# Altium PCB RF_AMPL_001.PcbDoc (part 2 of 2)
Units mm, origin at the board's own origin, x right, y up, seen from the top; angles counter-clockwise.
Board outline 164 x 92 mm, 4 copper layers (TOP, GND, SIG, BOT), stack 1.625 mm thick; 120 components, 60 nets, 294 pads, 1389 vias.
Unrouted connection lines stored in the file: 51.
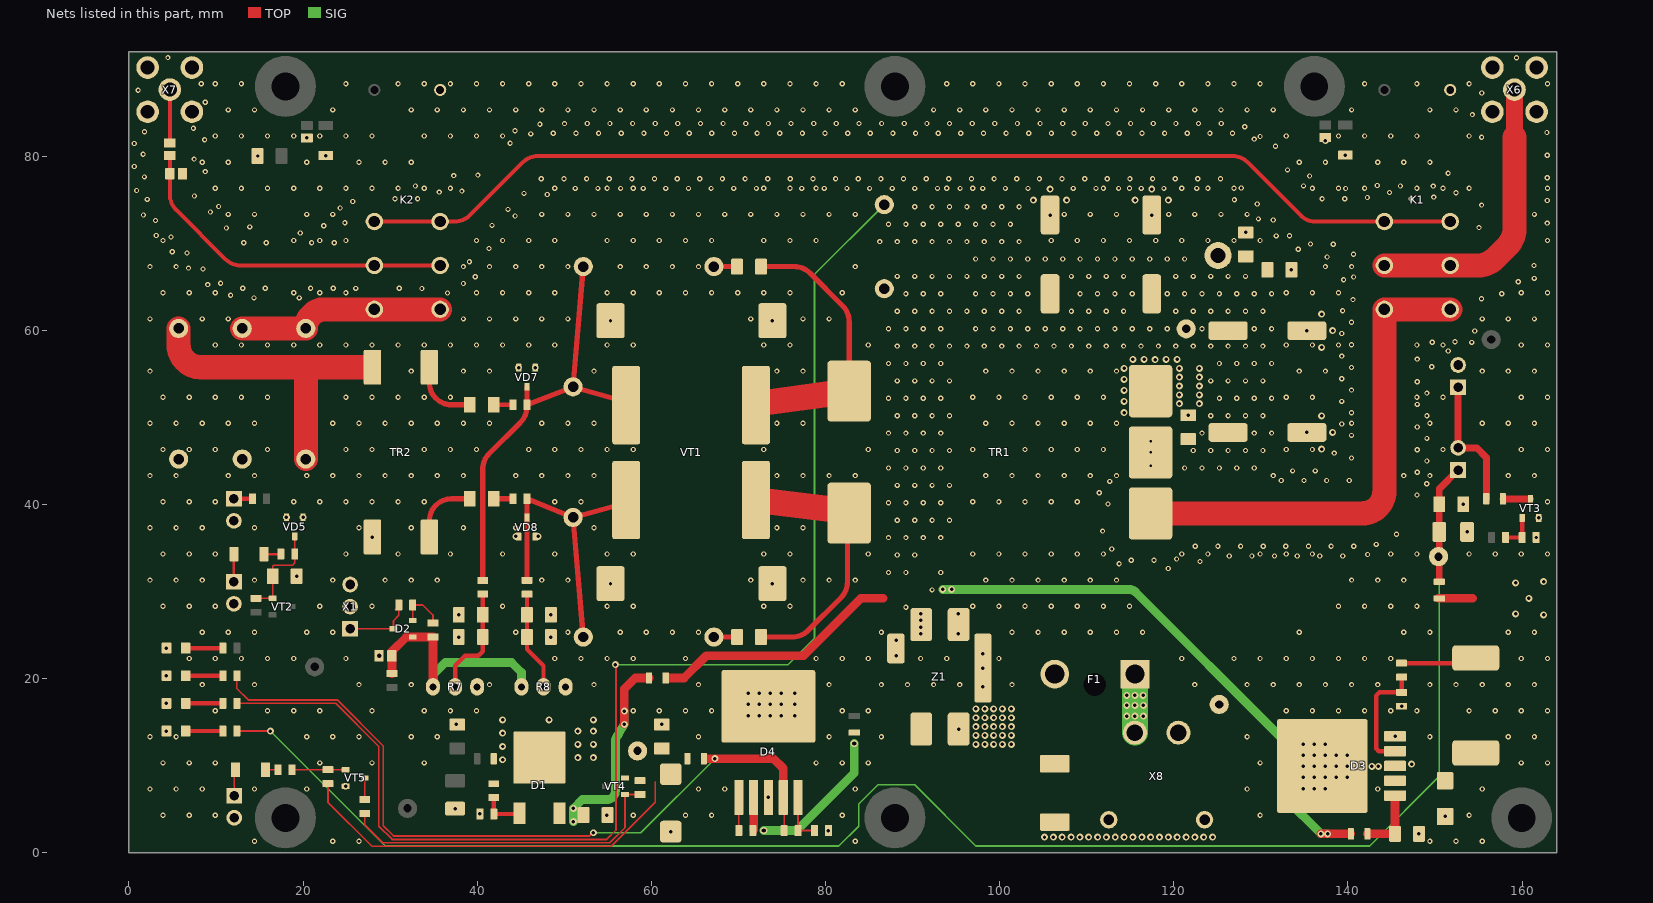
[diagram p4: the nets of this part, all layers, seen from the top]

## Via types
v1: diameter 0.6, hole 0.3, TOP to BOT, tented both sides, 1161 vias
v2: diameter 0.8, hole 0.4, TOP to BOT, tented both sides, 222 vias
v3: diameter 0.85, hole 0.5, TOP to BOT, tented both sides, 6 vias

## Nets (pads, with @x,y where several pads share a name; then routed paths per layer and width w, separated by ;. In a path a pad name is that pad's centre, name@x,y a point inside that pad or via, vN(x,y) a via of type N, cw(c..) or ccw(c..) an arc to the next point about the centre after c; other vN are vias at no path point) (continued)
+24V_IN: C1.2 C2.1 C11.1 C12.1 C13.1 C14.1 C16.1 L1.1 R27.1 TP5.1 TP6.1 TR1.4 | length 152.1
  TOP w0.2: R27.1@12.395,17.145 23.749,17.145 28.702,12.192 28.702,3.048 30.226,1.524 54.864,1.524 55.944,2.604 55.944,21.526 v2(55.88,21.59)
  SIG w0.2: v2(55.88,21.59) 75.692,21.59 78.74,24.638 78.74,66.41 L1.1@86.756,74.426
  other v1: 121.243,44.181 123.243,44.181 125.243,44.181 127.243,44.181 129.243,44.181 117.348,44.45 117.348,45.974 122.243,46.181 124.243,46.181 126.243,46.181 128.243,46.181 130.243,46.181 117.348,47.244 123.243,48.181 129.243,48.181 131.243,48.181 124.243,50.181 126.243,50.181 128.243,50.181 130.243,50.181 125.243,52.181 127.243,52.181 129.243,52.181 131.243,52.181 124.243,54.181 126.243,54.181 128.243,54.181 130.243,54.181 125.243,56.181 127.243,56.181 129.243,56.181 131.243,56.181 96.243,58.181 98.243,58.181 100.243,58.181 102.243,58.181 104.243,58.181 106.243,58.181 108.243,58.181 110.243,58.181 112.243,58.181 114.243,58.181 116.243,58.181 118.243,58.181 120.243,58.181 122.243,58.181 124.243,58.181 126.243,58.181 128.243,58.181 130.243,58.181 97.243,60.181 99.243,60.181 101.243,60.181 103.243,60.181 105.243,60.181 107.243,60.181 109.243,60.181 111.243,60.181 113.243,60.181 115.243,60.181 117.243,60.181 119.243,60.181 123.243,60.181 129.243,60.181 131.243,60.181 96.243,62.181 98.243,62.181 100.243,62.181 102.243,62.181 108.243,62.181 110.243,62.181 112.243,62.181 114.243,62.181 120.243,62.181 122.243,62.181 124.243,62.181 126.243,62.181 128.243,62.181 130.243,62.181 97.243,64.181 99.243,64.181 101.243,64.181 103.243,64.181 109.243,64.181 111.243,64.181 113.243,64.181 115.243,64.181 119.243,64.181 121.243,64.181 123.243,64.181 125.243,64.181 127.243,64.181 129.243,64.181 131.243,64.181 96.243,66.181 98.243,66.181 100.243,66.181 102.243,66.181 108.243,66.181 110.243,66.181 112.243,66.181 114.243,66.181 120.243,66.181 122.243,66.181 124.243,66.181 126.243,66.181 128.243,66.181 97.243,68.181 99.243,68.181 101.243,68.181 103.243,68.181 105.243,68.181 107.243,68.181 109.243,68.181 111.243,68.181 113.243,68.181 115.243,68.181 117.243,68.181 119.243,68.181 121.243,68.181 86.243,70.181 88.243,70.181 90.243,70.181 92.243,70.181 94.243,70.181 96.243,70.181 98.243,70.181 100.243,70.181 102.243,70.181 87.243,72.181 89.243,72.181 91.243,72.181 93.243,72.181 95.243,72.181 97.243,72.181 99.243,72.181 101.243,72.181 90.243,74.181 92.243,74.181 94.243,74.181 96.243,74.181 98.243,74.181 100.243,74.181 102.243,74.181
+V_FAN: C31.1 C33.1 FB2.1 R28.1 TP1.1 X4.1 | length 192.9
  TOP w0.2: R28.1@12.395,13.97 v2(16.256,13.97)
  TOP w0.8: FB2.1@150.495,31.369 C33.1@150.495,36.83 C31.1@150.495,40.005 150.495,41.783 X4.1@152.654,43.942
  SIG w0.2: v2(16.256,13.97) 29.464,0.762 81.534,0.762 83.82,3.048 83.82,5.588 86.032,7.8 90.244,7.8 97.282,0.762 142.494,0.762 150.495,8.763 TP1.1@150.495,34
BIAS_A: C8.1 C18.1 R7.2 R18.1 | length 12.8
  TOP w0.5: R7.2@37.465,19.05 37.465,21.463 38.608,22.606 40.132,22.606 40.64,23.114 C18.1@40.64,24.765 C8.1@40.64,27.305 R18.1@40.64,29.68
BIAS_B: C9.1 C19.1 R8.2 R19.1 | length 11.4
  TOP w0.5: R19.1@45.72,29.68 C9.1@45.72,27.305 C19.1@45.72,24.765 45.72,23.368 47.625,21.463 R8.2@47.625,19.05
GND: C1.1 C2.2 C3.2 C4.2 C5.2 C6.2 C7.2 C8.2 C9.2 C10.2 C11.2 C12.2 C13.2 C14.2 C15.2 C16.2 C17.2 C18.2 C19.2 C22.2 C24.1 C27.1 C28.2 C31.2 C32.2 C33.2 D3.3 D3.5 D3.6 D4.3 HG1.CA HG2.CA HG3.CA HG4.CA K1.1 K2.1 R2.2 R5.1 R7.3 R8.3 R14.1 R17.1 R23.1 R32.2 TP3.1 TR1.1 TR2.1 VD2.AN VD5.1 VD5.2 VD6.AN VD7.1 VD7.2 VD8.1 VD8.2 VD10.AN VT1.5 VT3.2 VT5.2 X1.2 X1.3 X2.2 X3.2 X5.2 X6.2 X7.2 X9.2 Z1.4 Z1.5 Z1.6
  other v1: 14.422,1.304 23.422,1.304 26.422,1.304 83.422,1.304 149.422,1.304 152.422,1.304 155.422,1.304 3.922,4.304 6.922,4.304 9.922,4.304 57.922,4.304 63.922,4.304 66.922,4.304 81.922,4.304 129.922,4.304 153.922,4.304 2.422,7.304 5.422,7.304 8.422,7.304 14.422,7.304 20.422,7.304 65.422,7.304 68.422,7.304 83.422,7.304 128.422,7.304 143.422,7.304 155.422,7.304 3.922,10.304 6.922,10.304 9.922,10.304 21.922,10.304 27.922,10.304 33.922,10.304 78.922,10.304 81.922,10.304 84.922,10.304 129.922,10.304 159.922,10.304 162.922,10.304 2.422,13.304 5.422,13.304 20.422,13.304 23.422,13.304 26.422,13.304 32.422,13.304 35.422,13.304 65.422,13.304 80.422,13.304 86.422,13.304 128.422,13.304 149.422,13.304 158.422,13.304 161.422,13.304 9.922,16.304 15.922,16.304 18.922,16.304 21.922,16.304 27.922,16.304 33.922,16.304 36.922,16.304 39.922,16.304 57.922,16.304 60.922,16.304 63.922,16.304 66.922,16.304 81.922,16.304 84.922,16.304 132.922,16.304 135.922,16.304 138.922,16.304 141.922,16.304 144.922,16.304 147.922,16.304 153.922,16.304 156.922,16.304 159.922,16.304 162.922,16.304 8.422,19.304 14.422,19.304 26.422,19.304 32.422,19.304 41.422,19.304 53.422,19.304 65.422,19.304 80.422,19.304 86.422,19.304 89.422,19.304 92.422,19.304 95.422,19.304 101.422,19.304 122.422,19.304 128.422,19.304 131.422,19.304 134.422,19.304 137.422,19.304 140.422,19.304 143.422,19.304 149.422,19.304 152.422,19.304 155.422,19.304 158.422,19.304 161.422,19.304 6.922,22.304 9.922,22.304 12.922,22.304 15.922,22.304 18.922,22.304 24.922,22.304 48.922,22.304 51.922,22.304 54.922,22.304 57.922,22.304 63.922,22.304 78.922,22.304 81.922,22.304 84.922,22.304 90.922,22.304 93.922,22.304 99.922,22.304 120.922,22.304 126.922,22.304 129.922,22.304 132.922,22.304 135.922,22.304 138.922,22.304 141.922,22.304 144.922,22.304 159.922,22.304 162.922,22.304 8.422,25.304 11.422,25.304 14.422,25.304 20.422,25.304 23.422,25.304 44.422,25.304 50.422,25.304 56.422,25.304 59.422,25.304 62.422,25.304 65.422,25.304 86.422,25.304 101.422,25.304 104.422,25.304 107.422,25.304 110.422,25.304 113.422,25.304 116.422,25.304 134.422,25.304 146.422,25.304 149.422,25.304 158.422,25.304 161.422,25.304 3.922,28.304 6.922,28.304 9.922,28.304 21.922,28.304 27.922,28.304 42.922,28.304 54.922,28.304 57.922,28.304 72.922,28.304 75.922,28.304 96.922,28.304 99.922,28.304 102.922,28.304 105.922,28.304 108.922,28.304 111.922,28.304 114.922,28.304 138.922,28.304 141.922,28.304 144.922,28.304 147.922,28.304 2.422,31.304 5.422,31.304 8.422,31.304 14.422,31.304 23.422,31.304 29.422,31.304 32.422,31.304 35.422,31.304 47.422,31.304 50.422,31.304 71.422,31.304 77.422,31.304 80.422,31.304 83.422,31.304 98.422,31.304 101.422,31.304 104.422,31.304 107.422,31.304 110.422,31.304 113.422,31.304 140.422,31.304 143.422,31.304 146.422,31.304 119.37,32.632 113.723,33.192 123.011,33.437 115.128,33.579 117.728,33.57 120.324,33.72 126.375,34.071 128.975,34.071 131.575,34.071 134.175,34.071 136.775,34.071 139.422,34.073 142.267,34.243 3.922,34.304 6.922,34.304 9.922,34.304 24.922,34.304 30.922,34.304 36.922,34.304 42.922,34.304 48.922,34.304 54.922,34.304 57.922,34.304 72.922,34.304 75.922,34.304 84.922,34.304 96.922,34.304 99.922,34.304 102.922,34.304 105.922,34.304 108.922,34.304 111.922,34.304 120.922,34.304 123.922,34.304 129.922,34.304 132.922,34.304 135.922,34.304 144.922,34.304 147.922,34.304 153.922,34.304 156.922,34.304 159.922,34.304 162.922,34.304 112.875,34.877 122.475,35.181 125.075,35.181 127.675,35.181 130.275,35.181 132.875,35.181 135.475,35.181 138.075,35.181 140.675,35.181 143.266,35.401 145.588,36.569 111.833,36.933 2.422,37.304 5.422,37.304 8.422,37.304 14.422,37.304 26.422,37.304 32.422,37.304 38.422,37.304 44.422,37.304 53.422,37.304 74.422,37.304 77.422,37.304 112.451,40.042 3.922,40.304 6.922,40.304 9.922,40.304 18.922,40.304 21.922,40.304 24.922,40.304 27.922,40.304 30.922,40.304 33.922,40.304 48.922,40.304 51.922,40.304 96.922,40.304 99.922,40.304 102.922,40.304 105.922,40.304 108.922,40.304 162.922,40.304 147.943,41.08 111.449,41.337 149.065,42.374 112.659,42.633 132.355,42.737 134.955,42.737 137.555,42.737 140.155,42.737 2.422,43.304 5.422,43.304 11.422,43.304 14.422,43.304 20.422,43.304 23.422,43.304 26.422,43.304 29.422,43.304 32.422,43.304 35.422,43.304 38.422,43.304 44.422,43.304 47.422,43.304 50.422,43.304 53.422,43.304 74.422,43.304 77.422,43.304 80.422,43.304 83.422,43.304 98.422,43.304 101.422,43.304 104.422,43.304 107.422,43.304 110.422,43.304 113.422,43.304 131.422,43.304 146.422,43.304 149.422,43.304 158.422,43.304 161.422,43.304 147.968,43.68 133.655,43.847 136.255,43.847 149.078,44.98 140.412,45.325 138.428,45.886 147.968,46.28 3.922,46.304 6.922,46.304 9.922,46.304 15.922,46.304 24.922,46.304 27.922,46.304 30.922,46.304 33.922,46.304 36.922,46.304 39.922,46.304 45.922,46.304 48.922,46.304 51.922,46.304 54.922,46.304 57.922,46.304 72.922,46.304 84.922,46.304 96.922,46.304 99.922,46.304 102.922,46.304 105.922,46.304 108.922,46.304 111.922,46.304 132.922,46.304 135.922,46.304 150.922,46.304 159.922,46.304 162.922,46.304 149.078,47.58 140.412,47.925 147.968,48.88 139.302,49.225 2.422,49.304 5.422,49.304 8.422,49.304 11.422,49.304 14.422,49.304 23.422,49.304 26.422,49.304 29.422,49.304 32.422,49.304 35.422,49.304 38.422,49.304 41.422,49.304 47.422,49.304 50.422,49.304 53.422,49.304 74.422,49.304 77.422,49.304 98.422,49.304 101.422,49.304 104.422,49.304 107.422,49.304 110.422,49.304 113.422,49.304 140.422,49.304 149.422,49.304 155.422,49.304 158.422,49.304 161.422,49.304 149.078,50.18 140.412,50.525 147.968,51.48 139.302,51.825 3.922,52.304 6.922,52.304 9.922,52.304 12.922,52.304 15.922,52.304 24.922,52.304 27.922,52.304 30.922,52.304 33.922,52.304 36.922,52.304 96.922,52.304 99.922,52.304 102.922,52.304 105.922,52.304 108.922,52.304 111.922,52.304 132.922,52.304 135.922,52.304 147.922,52.304 150.922,52.304 159.922,52.304 162.922,52.304 149.078,52.78 140.412,53.125 147.968,54.08 139.302,54.425 2.422,55.304 32.422,55.304 38.422,55.304 41.422,55.304 53.422,55.304 74.422,55.304 77.422,55.304 98.422,55.304 101.422,55.304 104.422,55.304 107.422,55.304 110.422,55.304 113.422,55.304 134.422,55.304 137.422,55.304 155.422,55.304 158.422,55.304 161.422,55.304 140.412,55.725 149.641,55.801 147.968,56.68 139.302,57.025 151.515,57.61 9.922,58.304 12.922,58.304 15.922,58.304 18.922,58.304 21.922,58.304 24.922,58.304 27.922,58.304 30.922,58.304 33.922,58.304 36.922,58.304 39.922,58.304 42.922,58.304 45.922,58.304 48.922,58.304 54.922,58.304 57.922,58.304 72.922,58.304 75.922,58.304 84.922,58.304 132.922,58.304 135.922,58.304 138.922,58.304 147.922,58.304 150.922,58.304 159.922,58.304 162.922,58.304 140.412,58.325 154.221,58.606 149.697,58.622 152.297,58.673 139.302,59.625 154.582,59.914 140.412,60.925 2.422,61.304 8.422,61.304 11.422,61.304 38.422,61.304 41.422,61.304 44.422,61.304 47.422,61.304 50.422,61.304 71.422,61.304 77.422,61.304 80.422,61.304 155.422,61.304 158.422,61.304 161.422,61.304 139.389,62.248 140.584,63.519 155.346,63.627 14.367,63.715 19.565,63.715 11.677,64.01 157.683,64.186 36.595,64.277 3.922,64.304 6.922,64.304 9.922,64.304 18.922,64.304 21.922,64.304 24.922,64.304 39.922,64.304 42.922,64.304 45.922,64.304 48.922,64.304 54.922,64.304 57.922,64.304 60.922,64.304 63.922,64.304 66.922,64.304 69.922,64.304 72.922,64.304 75.922,64.304 81.922,64.304 132.922,64.304 135.922,64.304 138.922,64.304 159.922,64.304 162.922,64.304 26.067,64.807 33.653,64.787 13.067,64.824 15.667,64.824 20.867,64.824 23.467,64.824 31.053,64.824 9.051,65.24 38.419,65.363 10.529,65.389 159.562,65.573 139.507,65.798 161.395,65.951 140.661,66.118 39.768,66.145 8.515,67.033 6.853,67.131 2.422,67.304 5.422,67.304 38.422,67.304 41.422,67.304 44.422,67.304 47.422,67.304 50.422,67.304 56.422,67.304 59.422,67.304 62.422,67.304 65.422,67.304 83.422,67.304 137.422,67.304 140.422,67.304 161.375,67.436 39.104,67.871 137.616,68.406 140.642,68.718 6.677,68.872 4.973,69.007 134.289,69.303 41.355,69.384 138.309,69.864 135.709,69.897 13.183,70.056 15.783,70.056 20.983,70.056 23.583,70.056 3.922,70.304 18.922,70.304 21.922,70.304 24.922,70.304 39.922,70.304 42.922,70.304 45.922,70.304 48.922,70.304 54.922,70.304 57.922,70.304 60.922,70.304 63.922,70.304 66.922,70.304 72.922,70.304 75.922,70.304 78.922,70.304 105.922,70.304 108.922,70.304 111.922,70.304 114.922,70.304 117.922,70.304 120.922,70.304 123.922,70.304 126.922,70.304 129.922,70.304 162.922,70.304 4.838,70.71 131.766,70.837 133.29,70.851 3.15,70.883 19.683,71.165 11.204,71.743 155.063,71.789 13.87,71.862 22.387,71.986 41.704,72.04 162.909,72.305 24.806,72.35 3.053,72.601 131.418,72.655 129.721,72.782 44.355,73.122 1.664,73.233 11.422,73.304 14.422,73.304 20.422,73.304 23.422,73.304 47.422,73.304 50.422,73.304 53.422,73.304 56.422,73.304 59.422,73.304 62.422,73.304 65.422,73.304 68.422,73.304 71.422,73.304 74.422,73.304 77.422,73.304 80.422,73.304 83.422,73.304 107.422,73.304 110.422,73.304 113.422,73.304 119.422,73.304 122.422,73.304 125.422,73.304 128.422,73.304 161.422,73.304 9.366,73.582 43.542,73.879 24.255,74.043 10.307,74.209 155.353,74.373 129.579,74.493 25.712,74.787 162.909,74.905 126.963,74.997 2.117,75.027 30.563,75.096 33.163,75.096 137.043,75.096 139.643,75.096 147.275,75.096 142.238,75.244 149.868,75.289 7.527,75.42 48.05,75.592 45.381,75.717 152.418,75.796 144.776,75.812 35.647,75.863 38.244,75.98 0.884,76.046 51.268,76.285 53.868,76.285 56.468,76.285 59.068,76.285 61.668,76.285 64.268,76.285 66.868,76.285 69.468,76.285 72.068,76.285 77.268,76.285 79.868,76.285 82.468,76.285 85.068,76.285 87.668,76.285 90.268,76.285 92.868,76.285 95.468,76.285 98.068,76.285 100.668,76.285 103.268,76.285 108.468,76.285 111.068,76.285 113.668,76.285 116.268,76.285 118.868,76.285 122.649,76.285 139.736,76.276 9.922,76.304 12.922,76.304 15.922,76.304 18.922,76.304 21.922,76.304 24.922,76.304 27.922,76.304 30.922,76.304 33.922,76.304 36.922,76.304 48.922,76.304 54.922,76.304 57.922,76.304 72.922,76.304 75.922,76.304 78.922,76.304 93.922,76.304 96.922,76.304 111.922,76.304 114.922,76.304 120.922,76.304 123.922,76.304 126.922,76.304 135.922,76.304 138.922,76.304 141.922,76.304 147.922,76.304 150.922,76.304 153.922,76.304 162.922,76.304 127.741,76.332 32.906,76.563 146.027,76.562 149.796,76.55 134.901,76.57 143.374,76.627 47.368,77.394 49.968,77.394 52.568,77.394 55.168,77.394 57.768,77.394 60.368,77.394 62.968,77.394 65.568,77.394 68.168,77.394 70.768,77.394 73.368,77.394 75.968,77.394 78.568,77.394 81.168,77.394 83.768,77.394 86.368,77.394 88.968,77.394 91.568,77.394 94.168,77.394 96.768,77.394 99.368,77.394 101.968,77.394 104.568,77.394 107.168,77.394 109.768,77.394 112.368,77.394 114.968,77.394 117.568,77.394 120.168,77.394 122.768,77.394 125.368,77.394 162.909,77.505 1.786,77.605 135.603,77.713 37.309,77.763 40.083,77.818 151.509,78.04 8.758,78.214 133.063,78.409 0.607,78.801 8.422,79.304 11.422,79.304 20.422,79.304 26.422,79.304 29.422,79.304 32.422,79.304 134.422,79.304 137.422,79.304 143.422,79.304 146.422,79.304 149.422,79.304 7.493,79.654 162.909,80.105 1.636,80.201 131.683,81.121 0.607,81.442 43.781,81.473 8.694,81.868 129.259,81.95 155.353,82.173 129.916,82.25 9.922,82.304 12.922,82.304 15.922,82.304 18.922,82.304 21.922,82.304 24.922,82.304 27.922,82.304 33.922,82.304 36.922,82.304 39.922,82.304 42.922,82.304 132.922,82.304 138.922,82.304 141.922,82.304 144.922,82.304 147.922,82.304 153.922,82.304 46.15,82.546 48.749,82.626 51.349,82.626 53.949,82.626 56.549,82.626 59.149,82.626 61.749,82.626 64.349,82.626 66.949,82.626 69.549,82.626 72.149,82.626 74.749,82.626 77.349,82.626 79.949,82.626 82.549,82.626 85.149,82.626 87.749,82.626 90.349,82.626 92.949,82.626 95.549,82.626 98.149,82.626 100.749,82.626 103.349,82.626 105.949,82.626 108.549,82.626 111.149,82.626 113.749,82.626 116.349,82.626 118.949,82.626 121.549,82.626 124.149,82.626 126.749,82.626 162.859,82.704 1.8,82.796 44.347,82.909 7.407,83.192 128.148,83.378 47.203,83.646 50.031,83.735 52.649,83.735 55.249,83.735 57.849,83.735 60.449,83.735 63.049,83.735 65.649,83.735 68.249,83.735 70.849,83.735 73.449,83.735 76.049,83.735 78.649,83.735 81.249,83.735 83.849,83.735 86.449,83.735 89.049,83.735 91.649,83.735 94.249,83.735 96.849,83.735 99.449,83.735 102.049,83.735 104.649,83.735 107.249,83.735 109.849,83.735 112.449,83.735 115.049,83.735 117.649,83.735 120.249,83.735 122.849,83.735 125.448,83.736 154.296,84.762 11.422,85.304 14.422,85.304 23.422,85.304 32.422,85.304 35.422,85.304 38.422,85.304 41.422,85.304 44.422,85.304 47.422,85.304 50.422,85.304 53.422,85.304 56.422,85.304 59.422,85.304 62.422,85.304 65.422,85.304 68.422,85.304 71.422,85.304 74.422,85.304 77.422,85.304 80.422,85.304 83.422,85.304 92.422,85.304 95.422,85.304 98.422,85.304 101.422,85.304 104.422,85.304 107.422,85.304 110.422,85.304 113.422,85.304 116.422,85.304 119.422,85.304 122.422,85.304 125.422,85.304 128.422,85.304 131.422,85.304 140.422,85.304 149.422,85.304 152.422,85.304 8.766,86.177 155.379,87.24 1.061,87.57 8.319,88.312 9.922,88.304 12.922,88.304 24.922,88.304 30.922,88.304 33.922,88.304 36.922,88.304 39.922,88.304 42.922,88.304 45.922,88.304 48.922,88.304 51.922,88.304 54.922,88.304 57.922,88.304 60.922,88.304 63.922,88.304 66.922,88.304 69.922,88.304 72.922,88.304 75.922,88.304 78.922,88.304 81.922,88.304 93.922,88.304 96.922,88.304 99.922,88.304 102.922,88.304 105.922,88.304 108.922,88.304 111.922,88.304 114.922,88.304 117.922,88.304 120.922,88.304 123.922,88.304 126.922,88.304 129.922,88.304 141.922,88.304 147.922,88.304 153.922,88.304 162.922,88.304 4.484,91.308 159.364,91.305
  other v2: 148.165,2.152 62.23,2.415 80.34,2.54 151.159,4.155 54.864,4.318 40.31,4.445 37.465,5.055 73.457,6.35 134.874,7.366 136.144,7.366 137.414,7.366 24.892,7.625 134.874,8.636 136.144,8.636 137.414,8.636 138.684,8.636 139.954,8.636 134.874,9.906 136.144,9.906 137.414,9.906 138.684,9.906 139.954,9.906 142.748,9.906 143.51,9.906 147.32,10.16 134.874,11.176 136.144,11.176 137.414,11.176 138.684,11.176 139.954,11.176 134.874,12.446 136.144,12.446 137.414,12.446 145.415,13.355 4.318,13.97 37.592,14.732 61.214,14.732 71.12,15.748 72.39,15.748 73.66,15.748 74.93,15.748 76.454,15.748 146.177,16.815 71.12,17.018 72.39,17.018 73.66,17.018 74.93,17.018 76.454,17.018 4.318,17.145 71.12,18.288 72.39,18.288 73.66,18.288 74.93,18.288 76.454,18.288 98.044,19.05 4.318,20.32 98.091,21.193 88.138,22.606 98.044,22.86 4.318,23.495 88.138,24.384 37.89,24.765 48.47,24.765 95.25,25.146 37.89,27.305 48.47,27.305 162.48,27.305 159.271,27.417 95.25,27.432 160.782,29.21 55.312,30.9 73.912,30.9 159.258,30.988 162.48,31.115 19.26,31.75 161.62,36.195 27.972,36.25 44.45,36.322 46.99,36.322 153.695,36.83 161.92,38.44 18.1,38.522 20,38.522 153.245,40.005 136.986,46.355 135.288,48.26 138.256,48.26 136.986,50.165 121.666,50.248 114.3,50.546 120.65,51.562 122.936,51.562 114.3,51.816 120.65,52.578 122.936,52.578 114.3,53.086 120.65,53.594 122.936,53.594 114.3,54.356 120.65,54.61 122.936,54.61 114.3,55.626 120.65,55.626 122.936,55.626 44.77,55.7 46.67,55.7 117.857,56.619 115.316,56.642 116.586,56.642 119.126,56.642 120.396,56.642 136.986,58.039 135.288,59.944 138.256,59.944 55.312,61.1 73.912,61.1 136.986,61.849 133.512,66.944 128.27,71.225 105.791,73.232 117.475,73.232 103.886,74.93 107.696,74.93 115.57,74.93 119.38,74.93 105.791,76.2 117.475,76.2 14.776,80.01 22.606,80.063 139.7,80.116 137.414,81.788 20.447,82.079
  other v3: 28.739,22.606
GND_IN: VD1.AN X8.2 X8.MP Z1.3
  other v2: 105.156,1.778 106.172,1.778 107.188,1.778 108.204,1.778 109.22,1.778 110.236,1.778 111.252,1.778 112.268,1.778 113.284,1.778 114.3,1.778 115.316,1.778 116.332,1.778 117.348,1.778 118.364,1.778 119.38,1.778 120.396,1.778 121.412,1.778 122.428,1.778 123.444,1.778 124.46,1.778 97.282,12.446 98.298,12.446 99.314,12.446 100.33,12.446 101.346,12.446 97.282,13.462 98.298,13.462 99.314,13.462 100.33,13.462 101.346,13.462 95.291,14.193 97.282,14.478 98.298,14.478 99.314,14.478 100.33,14.478 101.346,14.478 97.282,15.494 98.298,15.494 99.314,15.494 100.33,15.494 101.346,15.494 97.282,16.51 98.298,16.51 99.314,16.51 100.33,16.51 101.346,16.51
NetC5_1: C5.1 C6.1 FB4.1 R33.2 R34.2 TP2.1 VT4.2 | length 46.3
  TOP w0.2: R33.2@22.86,7.925 22.86,5.787 27.923,0.724 55.392,0.724 60.452,5.784 60.452,8.128
NetC7_1: C7.1 R10.1 R15.1 VD5.3 VT2.1 | length 11.3
  TOP w0.2: R10.1@14.605,29.21 VT2.1@16.51,29.21 16.51,32.903 16.627,33.02 18.796,33.02 19.05,33.274 R15.1@19.05,34.29 VD5.3@19.05,36.322
NetC10_1: C10.1 FB2.2 L4.2 R30.1 | length 12.7
  TOP w0.5: R30.1@146.177,21.755 154.089,21.755 L4.2@154.686,22.352
  TOP w1: FB2.2@150.368,29.21 FB2.2@150.495,29.21 C10.1@154.305,29.21
NetC15_1: C15.1 D1.3 FB5.1 | length 24.2
  TOP w1: v2(56.896,14.732) v2(56.896,16.256) 56.896,18.796 58.166,20.066 FB5.1@59.756,20.066
  SIG w1: v2(51.054,3.556) v2(51.054,5.08) 52.07,6.096 54.88,6.096 ccw(c54.88,7.096) 55.88,7.096 55.88,12.794 cw(c56.88,12.794) 56.121,13.444 ccw(c55.363,14.097) 56.225,13.591 v2(56.896,14.732) v2(56.896,16.256)
NetC17_1: C17.1 D2.1 R1.2 R4.1 R7.1 R8.1 | length 27.9
  TOP w1: R1.2@30.226,20.574 30.226,23.114 31.877,24.765 33.02,24.765 R4.1@34.925,24.765 R7.1@34.925,19.05
  SIG w1: R7.1@34.925,19.05 34.953,19.078 34.953,20.475 36.322,21.844 43.942,21.844 45.085,20.701 R8.1@45.085,19.05
NetC20_1: C20.1 TR2.4 | length 7.9
  TOP w0.6: TR2.4@34.512,55.75 34.512,53.975 ccw(c37.052,53.975) 37.052,51.435 C20.1@39.16,51.435
NetC20_2: C20.2 R20.1 | length 2.2
  TOP w0.5: C20.2@41.91,51.435 R20.1@44.12,51.435
NetC21_1: C21.1 TR1.5 VT1.1 | length 30.7
  TOP w0.6: C21.1@72.6,67.31 76.418,67.31 cw(c76.418,64.77) 78.214,66.566 81.983,62.797 cw(c80.187,61.001) 82.727,61.001 TR1.5@82.727,53.002
  TOP w3: VT1.1@72.136,51.562 TR1.5@81.612,52.855
NetC21_2: C21.2 R21.1 | length 2.7
  TOP w0.6: R21.1@67.19,67.31 C21.2@69.85,67.31
NetC22_1: C22.1 D3.1 FB6.1 | length 7.6
  TOP w1: FB6.1@142.24,2.159 145.408,2.159 C22.1@145.415,2.152 D3.1@145.415,6.555
NetC23_1: C23.1 C28.1 K2.5 K2.6 | length 38.8
  TOP w0.46: C23.1@4.699,79.604 C28.1@4.699,77.978 4.699,75.601 ccw(c7.239,75.601) 5.443,73.805 11.064,68.184 ccw(c12.86,69.98) 12.86,67.44 K2.6@28.19,67.44 K2.5@35.75,67.44
NetC23_2: C23.2 X7.1 | length 6.1
  TOP w0.46: C23.2@4.699,81.497 X7.1@4.699,87.63
NetC25_1: C25.1 TR2.3 | length 7.9
  TOP w0.6: TR2.3@34.512,36.25 34.512,38.1 cw(c37.052,38.1) 37.052,40.64 C25.1@39.16,40.64
NetC25_2: C25.2 R26.1 | length 2.2
  TOP w0.6: C25.2@41.91,40.64 R26.1@44.12,40.64
NetC26_1: C26.1 TR1.3 VT1.2 | length 32.2
  TOP w0.6: C26.1@72.39,24.765 76.208,24.765 ccw(c76.208,27.305) 78.004,25.509 81.773,29.278 ccw(c79.977,31.074) 82.517,31.074 TR1.3@82.517,39.073
  TOP w2.77: TR1.3@82.727,38.998 TR1.3@82.797,39.163
  TOP w3: VT1.2@72.012,40.5 TR1.3@82.797,39.163
NetC26_2: C26.2 R22.1 | length 2.7
  TOP w0.6: R22.1@67.19,24.765 C26.2@69.85,24.765
NetD1_1: D1.1 R3.1 R5.2 | length 4.9
  TOP w0.5: R3.1@41.91,6.312 R5.2@41.91,4.445 44.845,4.445 D1.1@44.845,4.325
NetD1_2: D1.2 FB1.2 R3.2
  other v2: 42.926,10.668 51.562,10.922 53.34,10.922 42.926,12.192 51.562,12.446 53.34,12.446 42.926,13.716 51.562,13.97 53.34,13.97 42.926,15.24 48.26,15.24 53.34,15.24
NetD2_2: D2.2 R4.2 R6.1 | length 5.4
  TOP w0.2: D2.2@32.596,26.665 R6.1@32.596,28.448 ; R6.1@32.75,28.448 33.758,28.448 34.925,27.281 R4.2@34.925,26.365
NetD2_3: D2.3 R6.2 X1.1 | length 8.6
  TOP w0.2: X1.1@25.4,25.715 D2.3@30.396,25.715 30.396,26.648 30.996,27.248 30.996,28.223 R6.2@30.996,28.448 ; R6.2@30.632,27.923 30.65,27.923 30.95,28.223 R6.2@30.95,28.448
NetD3_2: D3.2 L4.1 VD2.CA
NetD3_4: D3.4 R2.1 R30.2 | length 13.2
  TOP w0.5: D3.4@145.415,11.655 143.549,11.655 143.256,11.948 143.256,18.034 143.637,18.415 R2.1@146.177,18.415 R30.2@146.177,20.155
NetD4_1: D4.1 R25.2 | length 3.8
  TOP w0.2: R25.2@70.053,2.54 D4.1@70.053,6.35
NetD4_2: D4.2 FB3.1 R25.1 | length 20.3
  TOP w1: R25.1@71.753,2.64 71.753,2.865 71.755,2.867 D4.2@71.755,6.35
  SIG w1: v3(72.898,2.54) 76.708,2.54 83.312,9.144 v3(83.312,12.537)
NetD4_4: D4.4 FB4.2 R11.2 R31.1 | length 88.8
  TOP w0.2: R11.2@12.395,20.32 12.395,18.847 13.697,17.545 23.915,17.545 29.21,12.25 29.21,3.106 30.392,1.924 52.923,1.924 53.285,2.286 v2(53.34,2.286) ; D4.4@75.159,6.35 75.26,6.248 R31.1@75.26,2.54
  TOP w1: 66.421,10.795 v2(67.31,10.795) 74.041,10.795 75.159,9.677 D4.4@75.159,6.35
  SIG w0.2: v2(53.34,2.286) 58.801,2.286 v2(67.31,10.795)
NetD4_5: D4.5 R31.2 R32.1 | length 5.7
  TOP w0.2: D4.5@76.86,6.35 R31.2@76.86,2.54 R32.1@78.74,2.54
NetF1_1: F1.1 X8.1 | length 6.7
  SIG w3: X8.1@115.541,13.779 115.541,15.722 v2(115.541,16.923) v2(115.541,18.059) F1.1@115.541,20.504
  other v2: 114.605,15.672 115.541,15.672 116.51,15.672 114.605,16.923 116.51,16.923 114.605,18.059 116.484,18.059
NetF1_2: F1.2 VD1.CA Z1.1
NetFB5_2: FB5.2 FB6.2 L1.2 Z1.2 | length 91.3
  TOP w1: FB5.2@61.976,20.066 63.754,20.066 66.294,22.606 77.47,22.606 84.075,29.211 86.614,29.211 ; v2(136.906,2.159) v2(137.668,2.159) FB6.2@140.34,2.159
  SIG w1: v2(93.472,30.226) v2(94.488,30.226) 114.902,30.226 cw(c114.902,29.226) 115.502,30.026 cw(c114.902,29.226) 115.609,29.933 132.297,13.245 cw(c131.588,12.54) 132.588,12.54 132.59,6.889 ccw(c133.59,6.89) 132.881,6.184 v2(136.906,2.159) v2(137.668,2.159)
  other v1: 89.243,28.181 92.243,30.181 87.243,32.181 89.243,32.181 93.243,32.181 88.243,34.181 90.243,34.181 87.243,36.181 89.243,36.181 91.243,36.181 93.243,36.181 88.243,38.181 90.243,38.181 92.243,38.181 94.243,38.181 87.243,40.181 89.243,40.181 91.243,40.181 93.243,40.181 88.243,42.181 90.243,42.181 92.243,42.181 94.243,42.181 87.243,44.181 89.243,44.181 91.243,44.181 93.243,44.181 88.243,46.181 90.243,46.181 92.243,46.181 94.243,46.181 87.243,48.181 89.243,48.181 91.243,48.181 93.243,48.181 88.243,50.181 90.243,50.181 92.243,50.181 94.243,50.181 87.243,52.181 89.243,52.181 91.243,52.181 93.243,52.181 88.243,54.181 90.243,54.181 92.243,54.181 94.243,54.181 87.243,56.181 89.243,56.181 91.243,56.181 93.243,56.181 88.243,58.181 90.243,58.181 92.243,58.181 94.243,58.181 87.243,60.181 89.243,60.181 91.243,60.181 93.243,60.181 88.243,62.181 90.243,62.181 92.243,62.181 94.243,62.181 89.243,64.181 91.243,64.181 93.243,64.181 88.243,66.181 90.243,66.181 92.243,66.181 94.243,66.181
  other v2: 90.932,25.146 90.932,25.908 90.932,26.67 90.932,27.432
NetFB7_1: FB7.1 VT3.3 | length 3.2
  TOP w0.8: FB7.1@157.795,40.64 VT3.3@160.97,40.64
NetFB7_2: FB7.2 X4.2 X5.1 | length 15.4
  TOP w0.8: X5.1@152.654,53.467 X4.2@152.654,46.482 154.813,46.482 155.895,45.4 FB7.2@155.895,40.64
NetHG1_AN: HG1.AN R11.1 | length 4.3
  TOP w0.5: HG1.AN@6.518,20.32 R11.1@10.795,20.32
NetHG2_AN: HG2.AN R12.2 | length 4.3
  TOP w0.5: HG2.AN@6.518,23.495 R12.2@10.795,23.495
NetHG3_AN: HG3.AN R27.2 | length 4.3
  TOP w0.5: HG3.AN@6.518,17.145 R27.2@10.795,17.145
NetHG4_AN: HG4.AN R28.2 | length 4.3
  TOP w0.5: HG4.AN@6.518,13.97 R28.2@10.795,13.97
NetK1_3: K1.3 K1.4 K2.3 K2.4 | length 129.4
  TOP w0.46: K2.4@28.19,72.48 K2.3@35.75,72.48 37.392,72.48 ccw(c37.392,75.02) 39.188,73.224 45.23,79.266 cw(c47.026,77.47) 47.026,80.01 126.71,80.01 cw(c126.71,77.47) 128.506,79.266 134.62,73.152 ccw(c136.242,74.774) 136.242,72.48 K1.4@144.19,72.48 K1.3@151.75,72.48
NetK1_5: K1.5 K1.6 X6.1 | length 33.1
  TOP w2: 159.131,82.169 X6.1@159.131,87.63
  TOP w2.77: K1.6@144.19,67.44 154.939,67.44 ccw(c154.939,70.21) 156.897,68.251 158.32,69.674 ccw(c156.361,71.632) 159.131,71.632 159.131,82.169
NetK1_7: K1.7 K1.8 TR1.2 | length 56.8
  TOP w2.77: TR1.2@117.34,38.959 141.65,38.959 ccw(c141.65,41.499) 144.19,41.499 K1.8@144.19,62.4 K1.7@151.75,62.4
NetK2_7: K2.7 K2.8 R13.1 R14.2 | length 24
  TOP w2.77: R14.2@13.018,60.205 R13.1@20.32,60.205 cw(c22.515,60.205) 22.515,62.4 K2.8@28.19,62.4 K2.7@35.75,62.4
NetR9_1: R9.1 X2.1 | length 2.1
  TOP w0.5: X2.1@12.065,40.64 R9.1@14.186,40.64
NetR13_2: R13.2 R23.2 TR2.2 | length 35.5
  TOP w2.77: R23.2@5.715,60.205 5.715,58.29 ccw(c8.255,58.29) 8.255,55.75 20.32,55.75 ; R13.2@20.32,45.205 20.32,55.75 ; TR2.2@27.305,55.75 20.32,55.75
NetR15_2: R15.2 VD3.AN | length 1.9
  TOP w0.3: VD3.AN@15.515,34.29 R15.2@17.45,34.29
NetR16_2: R16.2 R17.2 VT3.1 | length 4.2
  TOP w0.5: R16.2@158.115,36.195 R17.2@160.02,36.195 VT3.1@160.02,38.44
NetR18_2: R18.2 R20.2 R21.2 R24.2 VD7.3 VT1.3 | length 50
  TOP w0.6: R18.2@40.64,31.28 40.64,44.033 cw(c43.18,44.033) 41.384,45.829 44.976,49.421 ccw(c43.18,51.217) 45.72,51.217 R20.2@45.72,51.435 ; VD7.3@45.72,53.5 R20.2@45.72,51.435 ; R21.2@52.19,67.31 R24.2@51.012,53.5 ; VT1.3@57.112,51.769 R24.2@51.012,53.5 ; R20.2@45.72,51.435 45.82,51.474 R24.2@51.012,53.5
NetR19_2: R19.2 R22.2 R24.1 R26.2 VD8.3 VT1.4 | length 35.2
  TOP w0.6: R19.2@45.72,31.28 VD8.3@45.72,38.5 R26.2@45.72,40.64 45.82,40.6 R24.1@51.012,38.5 ; R22.2@52.19,24.765 R24.1@51.012,38.5 ; VT1.4@57.112,40.149 R24.1@51.012,38.5
NetR29_1: R29.1 R33.1 VT5.1 | length 6.1
  TOP w0.2: R29.1@18.745,9.525 VT5.1@24.892,9.525
NetR29_2: R29.2 VD4.AN | length 1.4
  TOP w0.2: VD4.AN@15.695,9.525 R29.2@17.145,9.525
NetR34_1: R34.1 R35.1 VT4.1 | length 38.3
  TOP w0.2: R35.1@27.092,4.496 27.092,3.192 29.16,1.124 55.226,1.124 56.98,2.878 VT4.1@56.98,6.67 58.598,6.67 R34.1@58.705,6.563
NetR35_2: R35.2 VT5.3 | length 2.5
  TOP w0.2: R35.2@27.092,6.096 VT5.3@27.092,8.575
NetVD3_CA: VD3.CA X3.1 | length 3.2
  TOP w0.3: X3.1@12.065,31.115 VD3.CA@12.065,34.29
NetVD4_CA: VD4.CA X9.1 | length 3
  TOP w0.2: X9.1@12.094,6.541 VD4.CA@12.094,9.374
  TOP w0.5: VD4.CA@12.094,9.374 VD4.CA@12.245,9.525
pads on no net: F1.MH1

## Polygon pours and split planes (outlines as drawn)
GND on TOP "NONET_L-01_P-001" (solid, remove dead copper, pour order 32): 0,91.948 0,0 164.084,0 164.084,91.948
GND on TOP "NONET_L-01_P-001" (solid, pour order 25): 113.538,57.404 122.682,57.404 123.698,56.388 123.698,50.292 122.682,49.276 113.538,49.276
+24V_IN on TOP "NONET_L-01_P-001" (solid, pour order 5): 85.09,75.565 102.87,75.565 102.87,68.58 131.572,68.58 131.572,44.577 129.591,42.596 114.3,42.596 114.3,48.895 122.555,48.895 123.825,50.165 123.825,56.515 122.555,57.785 95.885,57.785 95.885,68.58 85.09,68.58
GND on TOP "NONET_L-01_P-001" (solid, pour order 14): 138.764,50.673 133.176,50.673 133.176,45.847 138.764,45.847
GND on TOP "NONET_L-01_P-001" (solid, pour order 12): 115.062,76.708 115.062,71.12 119.888,71.12 119.888,76.708
GND on TOP "NONET_L-01_P-001" (solid, pour order 11): 103.378,76.708 103.378,71.12 108.204,71.12 108.204,76.708
NetD1_2 on TOP "NONET_L-01_P-001" (solid, pour order 21): 41.148,17.526 41.148,7.112 54.356,7.112 54.356,17.526
GND_IN on TOP "NONET_L-01_P-001" (solid, pour order 31): 103.632,5.334 103.632,0 125.222,0 125.222,5.334
GND_IN on TOP "NONET_L-01_P-001" (solid, pour order 30): 93.98,17.018 102.108,17.018 102.108,11.43 93.98,11.43
+12V_IN on TOP "NONET_L-01_P-001" (solid, pour order 27): 13.716,28.194 17.018,28.194 17.018,26.67 13.716,26.67
NetC15_1 on TOP "NONET_L-01_P-001" (solid, pour order 26): 48.514,5.842 52.832,5.842 52.832,2.794 48.514,2.794
+12V_TX on TOP "NONET_L-01_P-001" (solid, pour order 24): 18.177,28.591 18.177,27.797 ccw(c18.476,27.797) 18.476,27.498 20.64,27.498 ccw(c20.64,27.829) 20.971,27.829 20.971,28.559 ccw(c20.508,28.559) 20.508,29.022 18.608,29.022 ccw(c18.608,28.591)
+5V_TX on TOP "NONET_L-01_P-001" (solid, pour order 16): 52.578,8.128 52.578,7.112 55.372,7.112 55.372,8.128
NetC5_1 on TOP "NONET_L-01_P-001" (solid, pour order 10): 56.388,12.7 56.388,7.62 64.516,7.62 64.516,12.7
GND on TOP "NONET_L-01_P-001" (solid, pour order 9): 142.24,10.922 147.828,10.922 147.828,9.398 147.574,9.144 142.24,9.144
NetD3_2 on TOP "NONET_L-01_P-001" (solid, pour order 7): 144.018,8.89 144.018,7.62 147.32,7.62 147.828,7.112 151.892,7.112 153.67,8.89 157.734,8.89 157.734,13.462 151.892,13.462 151.13,12.7 147.32,8.89
NetF1_2 on TOP "TOP-NetF1_2" (solid, pour order 3): 91.44,5.715 109.855,5.715 109.855,22.86 102.235,22.86 102.235,11.43 93.726,11.43 93.726,17.145 88.265,17.145 88.265,8.89
+12V_TX on TOP "NONET_L-01_P-001" (solid, pour order 23): 18.288,80.922 16.764,80.922 16.764,77.749 18.288,77.749
+12V_IN on TOP "NONET_L-01_P-001" (solid, pour order 20): 35.56,12.7 35.56,6.858 40.894,6.858 40.894,12.7
NetD4_2 on TOP "NONET_L-01_P-001" (solid, pour order 19): 84.074,14.315 82.55,14.315 82.55,11.521 84.074,11.521
NetD4_2 on TOP "NONET_L-01_P-001" (solid, pour order 18): 71.12,3.302 71.12,1.778 73.914,1.778 73.914,3.302
+5V_TX on TOP "NONET_L-01_P-001" (solid, pour order 17): 29.464,16.772 30.988,16.772 30.988,19.558 29.464,19.558
GND on TOP "NONET_L-01_P-001" (solid, pour order 15): 163.75,31.623 158.67,31.623 158.67,26.797 163.75,26.797
GND on TOP "NONET_L-01_P-001" (solid, pour order 13): 138.764,62.357 133.176,62.357 133.176,57.531 138.764,57.531
NetC10_1 on TOP "NONET_L-01_P-001" (solid, pour order 8): 157.48,31.75 157.48,20.828 151.892,20.828 151.892,31.75
NetFB5_2 on TOP "NONET_L-01_P-001" (solid, pour order 4): 86.995,27.94 88.9,27.94 88.9,24.765 89.535,24.13 92.075,24.13 92.71,24.765 92.71,27.94 93.345,28.575 94.615,28.575 95.25,29.21 95.25,68.072 85.09,68.072 85.09,62.865 86.36,62.865 86.36,28.575
NetF1_1 on TOP "NONET_L-01_P-001" (solid, pour order 0): 111.76,22.86 119.38,22.86 119.38,11.43 111.76,11.43
+24V_IN on SIG "NONET_L-01_P-001" (solid, pour order 34): 85.09,75.565 102.87,75.565 102.87,68.58 131.572,68.58 131.572,44.577 129.921,42.926 114.3,42.926 114.3,48.895 122.555,48.895 123.825,50.165 123.825,56.515 122.555,57.785 95.885,57.785 95.885,68.58 85.09,68.58
NetD1_2 on SIG "NONET_L-01_P-001" (solid, pour order 22): 41.148,17.526 41.148,7.112 54.356,7.112 54.356,17.526
GND on BOT "NONET_L-01_P-001" (solid, pour order 35): 0,91.948 0,0 163.83,0 163.83,91.948
NetFB5_2 on BOT "NONET_L-01_P-001" (solid, pour order 33): 86.995,27.94 88.9,27.94 88.9,24.765 89.535,24.13 92.075,24.13 92.71,24.765 92.71,27.94 93.345,28.575 94.615,28.575 95.25,29.21 95.25,68.072 85.09,68.072 85.09,62.865 86.36,62.865 86.36,28.575
GND_IN on BOT "NONET_L-01_P-001" (solid, pour order 29): 91.44,17.78 127.508,17.78 127.508,0 91.44,0
GND on GND "NONET_L-01_P-001" (solid, pour order 6): 0,92.075 0,0 164.465,0 164.465,92.075

## Other copper
TOP:
  region net GND: 5.637,78.613 5.637,77.343 8.177,77.343 8.177,78.613

## Silkscreen, mask and mechanical layers (free items; w line width, h text height)
Top Overlay:
  lines w0.254: 115.57,24.638 146.05,24.638 146.05,33.02 115.57,33.02 115.57,24.638
  text "+12V_TX" at 157.756,59.287 h0.8
  text "Thermostat" at 153.87,50.746 h0.9
  text "FAN" at 154.124,48.206 h0.9
  text "TX_LED" at 3.255,42.26 h0.9
  text "+V_FAN" at 144.483,34.623 h0.8
  text "cTX_EN" at 3.255,32.862 h0.9
  text "Vitech-UA" at 116.532,30.68 h1.5
  text "RF_AMPL_002_V1" at 116.532,28.136 h1.5
  text "09.2026 Kyiv Ukraine" at 116.532,25.592 h1.5
  text "+12V_Tx" at 1.47,24.971 h0.8
  text "+5V" at 1.47,21.536 h0.8
  text "+12V_IN" at 17.218,18.875 h0.8
  text "+24V_IN" at 1.47,18.367 h0.8
  text "GND" at 126.946,15.694 h0.8
  text "+V_FAN" at 1.216,15.065 h0.8
  text "MAX" at 33.524,14.982 h1.1
  text "MIN" at 38.858,14.982 h1.1
  text "MAX" at 43.684,14.982 h1.1
  text "MIN" at 49.018,14.982 h1.1
  text "+5V" at 54.556,11.376 h0.8
  text "PWR_IN" at 123.644,6.712 h0.8
  text "+5V_TX" at 30.199,2.65 h0.8
  text "cDISABLE_BIAS" at 0.708,1.112 h0.9
Top Solder:
  lines w1: 90.983,14.199 90.983,10.109 92.507,8.585 104.877,8.585 106.324,10.033 106.324,20.269
  text "UR4UUZ" at 131.264,30.68 h1.5
Board:
  the board outline again, w0.254
Title:
  text "7.  THE FINISH OF THE BOARD IS HASL." at 214.17,150.5 h2.5
  text "8. PCB stackup:" at 214.17,144.8 h2.5

## Text inside footprints (layer, text, board x,y; h text height)
D1: Top Assembly "1" at 44.745,6.925 h0.7; Top Assembly "3" at 49.195,6.925 h0.7; Top Assembly "4" at 46.895,11.375 h0.7
D3: Top Assembly "1" at 142.199,4.965 h1.59 r90
HG1: Top Assembly "1" at 4.668,20.445 h0.3 r180; Top Assembly "2" at 6.318,20.445 h0.3 r180
HG2: Top Assembly "1" at 4.668,23.62 h0.3 r180; Top Assembly "2" at 6.318,23.62 h0.3 r180
HG3: Top Assembly "2" at 6.318,17.27 h0.3 r180; Top Assembly "1" at 4.668,17.27 h0.3 r180
HG4: Top Assembly "2" at 6.318,14.095 h0.3 r180; Top Assembly "1" at 4.668,14.095 h0.3 r180
K1: Top Assembly "NC" at 147.475,73.275 h1 r270; Top Assembly "COM" at 147.425,68.775 h1 r270; Top Assembly "NO" at 147.425,63.325 h1 r270
K2: Top Assembly "NC" at 31.475,73.275 h1 r270; Top Assembly "COM" at 31.425,68.775 h1 r270; Top Assembly "NO" at 31.425,63.325 h1 r270
VT1: Top Assembly "S" at 59.761,61.481 h1.52 r270; Top Assembly "G1" at 57.561,52.41 h1.52 r270; Top Assembly "D1" at 69.961,52.314 h1.52 r270; Top Assembly "D2" at 69.966,41.773 h1.52 r270; Top Assembly "G2" at 57.561,41.481 h1.52 r270; Top Assembly "S" at 59.761,31.881 h1.52 r270
X8: Top Assembly "1" at 116.141,10.979 h1.5 r90